# Altium PCB pira-smart-pcb.PcbDoc (part 2 of 3)
Units mm, origin at the board's own origin, x right, y up, seen from the top; angles counter-clockwise.
Board outline 65.1 x 30.1 mm, 2 copper layers (Top Layer, Bottom Layer); 85 components, 83 nets, 351 pads, 324 vias.
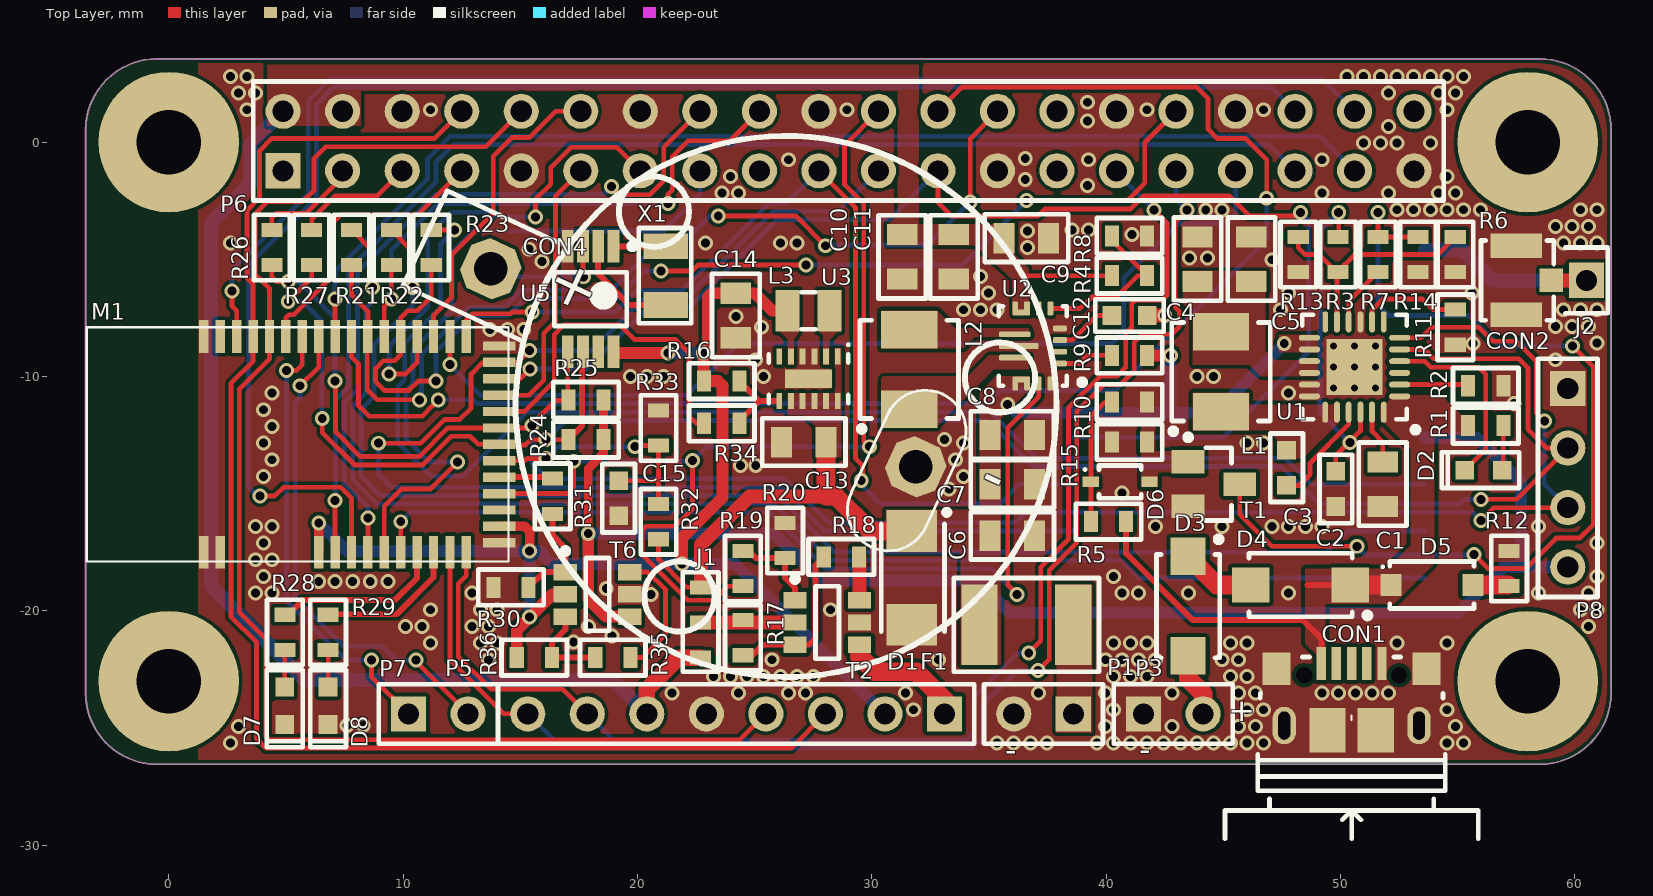
[diagram p0: Top Layer view]

## Part data (continued)
R13: "MULTICOMP - MCWR06X3302FTL - RES, THICK FILM, 33K, 1%, 0.1W, 0603", Manufacturer=MULTICOMP, Manufacturer Part Number=MCWR06X3302FTL, Power Rating=100, Resistance=33, Resistance Tolerance="± 1%", Resistor Case Style="0603 [1608 Metric]", Resistor Element Material="Thick Film", Supplier Part Number 1=2447342, Temperature Coefficient="± 100", Voltage Rating=50, Automotive Qualification Standard=-, ComponentLink1Description=http://www.farnell.com/datasheets/1849611.pdf, ComponentLink1URL=http://www.farnell.com/datasheets/1849611.pdf, Packaging="Cut Tape", Pricing 1="10=0.0033, 100=0.002, 500=0.0014, 1000=0.0011, 2500=0.0009 (GBP)", Product Range="MCWR Series", RoHS=Y-EX, Stock 1=10138, Supplier 1=Farnell, SVHC="No SVHC (07-Jul-2017)<!--FANDB--><div class=\"features-and-benefits-container\"><div class=\"features-and-benefits-desc-container\"><span class=\"features-and-benefits-container-desc\">SMD Chip Resistor, Thick Film, 33 kohm, 50 V, 0603 [1608 Metric], 100 mW, ± 1"
R16 R17 R20 R30 R33 R36: "MULTICOMP - MCMR06X104 JTL - RES, CERAMIC, 100K, 5%, 0.1W, 0603", Manufacturer=MULTICOMP, Manufacturer Part Number="MCMR06X104 JTL", Power Rating=100, Resistance Tolerance="± 5%", Resistor Case Style="0603 [1608 Metric]", Resistor Element Material=Ceramic, Resistor Mounting="Surface Mount Device<!--FANDB--><div class=\"features-and-benefits-container\"><div class=\"features-and-benefits-description\"><span class=\"features-benefits-value\">The Multicomp MCMR series resistors are automotive grade, anti sulphured thick film chip resistor. The resistance range includes E24 and E96 decade values from 1ohm to 10Mohm. These resistors are constructed on top of a high grade ceramic body.</span></div><div class=\"features-and-benefits-list\"><ul class=\"features-and-benefits-list-list\"><li class=\"features-and-benefits-list-item\">EIA 0402, 0603, 0805, 1206 chip sizes available</li><li class=\"features-and-benefits-list-item\">High reliability and stability</li><li class=\"features-and-benefits-list-item\">Automotive grade AEC-Q200 compliant</li><li class=\"features-and-benefits-list-item\">Complaint with (IEC 60068-1) 55/155/56 climatic category</li><li class=\"features-and-benefits-list-item\">Maximum operation voltage of 50V, 75V, 150V and 200V</li><li class=\"features-and-benefits-list-item\">Power rating of 62.5mW, 100mW, 125mW and 250mW</li><li class=\"features-and-benefits-list-item\">Available in ±1% and ±5% tolerance</li><li class=\"features-and-benefits-list-item\">Temperature coefficient (TCR) of +200ppm/°C, +100ppm/°C and -200ppm/°C to +400ppm/°C</li><li class=\"features-and-benefits-list-item\">Operating temperature range -55°C to 155", Supplier Part Number 1=2073357, Temperature Coefficient="± 100", Voltage Rating=75, Automotive Qualification Standard=-, ComponentLink1Description=http://www.farnell.com/datasheets/1716707.pdf, ComponentLink1URL=http://www.farnell.com/datasheets/1716707.pdf, Packaging="Cut Tape", Pricing 1="10=0.0109, 100=0.0085, 500=0.006, 1000=0.0048, 2500=0.004, 5000=0.003, 25000=0.002, 50000=0.0016 (GBP)", Product Range="MCMR Series", Resistance=100, RoHS=Y-EX, Stock 1=187, Supplier 1=Farnell
R18 R19 R31 R35: "MULTICOMP - MC0063W06031100R - RES, THICK FILM, 100R, 1%, 0.063W, 0603", Manufacturer=MULTICOMP, Manufacturer Part Number=MC0063W06031100R, Operating Temperature Max=155, Operating Temperature Min=-55, Operating Temperature Range="-55°C to +155", Power Rating=63, Resistance=100, Resistance Tolerance="± 1%", Resistor Case Style="0603 [1608 Metric]", Resistor Element Material="Thick Film", Resistor Mounting="Surface Mount Device", Supplier Part Number 1=2447227, Temperature Coeff. +=200, Temperature Coefficient="± 200", Tolerance +=1%, Voltage Rating=50, Voltage Rating V DC="50V<!--FANDB--><div class=\"features-and-benefits-container\"><div class=\"features-and-benefits-description\"><span class=\"features-benefits-value\">The Multicomp MC series current sense resistors are thick film chip resistors. The resistance range includes E96 and E24 decade values from 1ohm to 10Mohm.</span></div><div class=\"features-and-benefits-list\"><ul class=\"features-and-benefits-list-list\"><li class=\"features-and-benefits-list-item\">EIA 0402, 0603, 0805, 1206 chip sizes available</li><li class=\"features-and-benefits-list-item\">Small size and low weight</li><li class=\"features-and-benefits-list-item\">Suitable for both wave and reflow soldering</li><li class=\"features-and-benefits-list-item\">Reduction of assembly costs</li><li class=\"features-and-benefits-list-item\">Maximum working voltage of 50V(0402, 0603), 150V(0805), 200V(1206)</li><li class=\"features-and-benefits-list-item\">Available in ±1%, ±2% and ±5% tolerance</li><li class=\"features-and-benefits-list-item\">Power rating of 62.5mW, 100mW and 125mW</li><li class=\"features-and-benefits-list-item\">±400ppm/°C(1ohm to 10ohm), ±200ppm/°C(11ohm to 100ohm), ±100", Automotive Qualification Standard=-, ComponentLink1Description=http://www.farnell.com/datasheets/1788326.pdf, ComponentLink1URL=http://www.farnell.com/datasheets/1788326.pdf, ComponentLink2Description=http://www.farnell.com/cad/1561149.zip, ComponentLink2URL=http://www.farnell.com/cad/1561149.zip, ComponentLink3Description=http://www.farnell.com/datasheets/2289252.pdf, ComponentLink3URL=http://www.farnell.com/datasheets/2289252.pdf, External Depth=0.45, External Length / Height=1.6, External Width=0.8, No. of Pins=2, Packaging="Cut Tape", Product Range="MC Series", Reel Quantity=5000, RoHS=Y-EX, Supplier 1=Farnell, SVHC="No SVHC (12-Jan-2017)", Tape Width=8, Temperature Coeff. -=200, Tolerance -=1%
R24 R25: "MULTICOMP - MCMR06X4701FTL - RES, CERAMIC, 4K7, 1%, 0.1W, 0603", Manufacturer=MULTICOMP, Manufacturer Part Number=MCMR06X4701FTL, Power Rating=100, Resistance=4.7, Resistance Tolerance="± 1%", Resistor Case Style="0603 [1608 Metric]", Resistor Element Material=Ceramic, Supplier Part Number 1=2073509, Temperature Coefficient="± 100", Voltage Rating=75, Automotive Qualification Standard=-, ComponentLink1Description=http://www.farnell.com/datasheets/1716707.pdf, ComponentLink1URL=http://www.farnell.com/datasheets/1716707.pdf, Packaging="Cut Tape", Pricing 1="10=0.0085, 100=0.0051, 500=0.0036, 1000=0.0028, 2500=0.0023 (GBP)", Product Range="MCMR Series", RoHS=Y-EX, Stock 1=218618, Supplier 1=Farnell, SVHC="No SVHC (12-Jan-2017)<!--FANDB--><div class=\"features-and-benefits-container\"><div class=\"features-and-benefits-description\"><span class=\"features-benefits-value\">The Multicomp MCMR series resistors are automotive grade, anti sulphured thick film chip resistor. The resistance range includes E24 and E96 decade values from 1ohm to 10Mohm. These resistors are constructed on top of a high grade ceramic body.</span></div><div class=\"features-and-benefits-list\"><ul class=\"features-and-benefits-list-list\"><li class=\"features-and-benefits-list-item\">EIA 0402, 0603, 0805, 1206 chip sizes available</li><li class=\"features-and-benefits-list-item\">High reliability and stability</li><li class=\"features-and-benefits-list-item\">Automotive grade AEC-Q200 compliant</li><li class=\"features-and-benefits-list-item\">Complaint with (IEC 60068-1) 55/155/56 climatic category</li><li class=\"features-and-benefits-list-item\">Maximum operation voltage of 50V, 75V, 150V and 200V</li><li class=\"features-and-benefits-list-item\">Power rating of 62.5mW, 100mW, 125mW and 250mW</li><li class=\"features-and-benefits-list-item\">Available in ±1% and ±5% tolerance</li><li class=\"features-and-benefits-list-item\">Temperature coefficient (TCR) of +200ppm/°C, +100ppm/°C and -200ppm/°C to +400ppm/°C</li><li class=\"features-and-benefits-list-item\">Operating temperature range -55°C to 155"
R32: "MULTICOMP         MCWR06X2493FTL             SMD Chip Resistor, Thick Film, 249 kohm, 50 V, 0603 [1608 Metric], 100 mW,  1%, MCWR Series", Manufacturer=Multicomp, Manufacturer Part Number=MCWR06X2493FTL, Power Rating=100mW, Resistance=249kohm, Resistance Tolerance="± 1%", Resistor Case Style="0603 [1608 Metric]", Resistor Element Type="Thick Film", Supplier Part Number 1=2447306, Temperature Coefficient="± 100ppm/°C", Voltage Rating=50V, Automotive Qualification Standard=-, ComponentLink1Description=http://www.farnell.com/datasheets/1849611.pdf, ComponentLink1URL=http://www.farnell.com/datasheets/1849611.pdf, MSL=-, Packaging="Cut Tape", Pricing 1="10=0.0035, 100=0.0021, 500=0.0015, 1000=0.0012, 2500=0.001 (EUR)", Product Range="MCWR Series", Stock 1=5347, Supplier 1=Farnell, SVHC="No SVHC (17-Dec-2015)"
T1: "ON SEMICONDUCTOR/FAIRCHILD - MMBT3904 - TRANSISTOR, NPN, SOT-23", Collector Emitter Saturation Voltage Vce(on)=200, Collector Emitter Voltage V(br)ceo=40, Current Ic hFE=10, DC Current Gain hFE=300, Manufacturer="ON SEMICONDUCTOR/FAIRCHILD", Operating Temperature Max=150, Operating Temperature Min=-55, Operating Temperature Range="-55°C to +150", Power Dissipation Pd=350, Supplier Part Number 1=9846727, Transistor Case Style=SOT-23, Voltage Vcbo="60V<!--FANDB--><div class=\"features-and-benefits-container\"><div class=\"features-and-benefits-description\"><span class=\"features-benefits-value\">The MMBT3904 from Fairchild is a surface mount, NPN general purpose amplifier in SOT-23 package. This device is suitable for general purpose amplification and switching applications.</span></div><div class=\"features-and-benefits-list\"><ul class=\"features-and-benefits-list-list\"><li class=\"features-and-benefits-list-item\">Collector to emitter voltage (Vce) of 40V</li><li class=\"features-and-benefits-list-item\">Collector to emitter saturation voltage of 300mV at 50mA collector current</li><li class=\"features-and-benefits-list-item\">Power dissipation of 350mW</li><li class=\"features-and-benefits-list-item\">DC collector current of 200mA</li><li class=\"features-and-benefits-list-item\">DC current gain of 30 at Ic=100mA</li><li class=\"features-and-benefits-list-item\">Operating junction temperature range from -55°C to 150", Automotive Qualification Standard=-, ComponentLink1Description=http://www.farnell.com/datasheets/2304127.pdf, ComponentLink1URL=http://www.farnell.com/datasheets/2304127.pdf, ComponentLink2Description=http://www.farnell.com/datasheets/1942444.pdf, ComponentLink2URL=http://www.farnell.com/datasheets/1942444.pdf, Continuous Collector Current Ic Max=200, Current Ic Continuous a Max=200, DC Collector Current=200, Device Marking=BT3904, Gain Bandwidth ft Min=300, Gain Bandwidth ft Typ=300, Hfe Min=100, Manufacturer Part Number=MMBT3904, MSL="MSL 1 - Unlimited", No. of Pins=3, No. of Transistors=1, Noise Factor Max=5, Packaging="Cut Tape", Power Dissipation Ptot Max=350, Pricing 1="5=0.121, 50=0.043, 250=0.0401, 500=0.0261, 1500=0.0256 (GBP)", Product Range=-, RoHS=YES, SMD Marking=1, Stock 1=54090, Supplier 1=Farnell, SVHC="No SVHC (15-Jun-2015)", Transistor Polarity=NPN, Transition Frequency ft=300